# EAGLE board mBot_PCB (EAGLE 9.7.0)
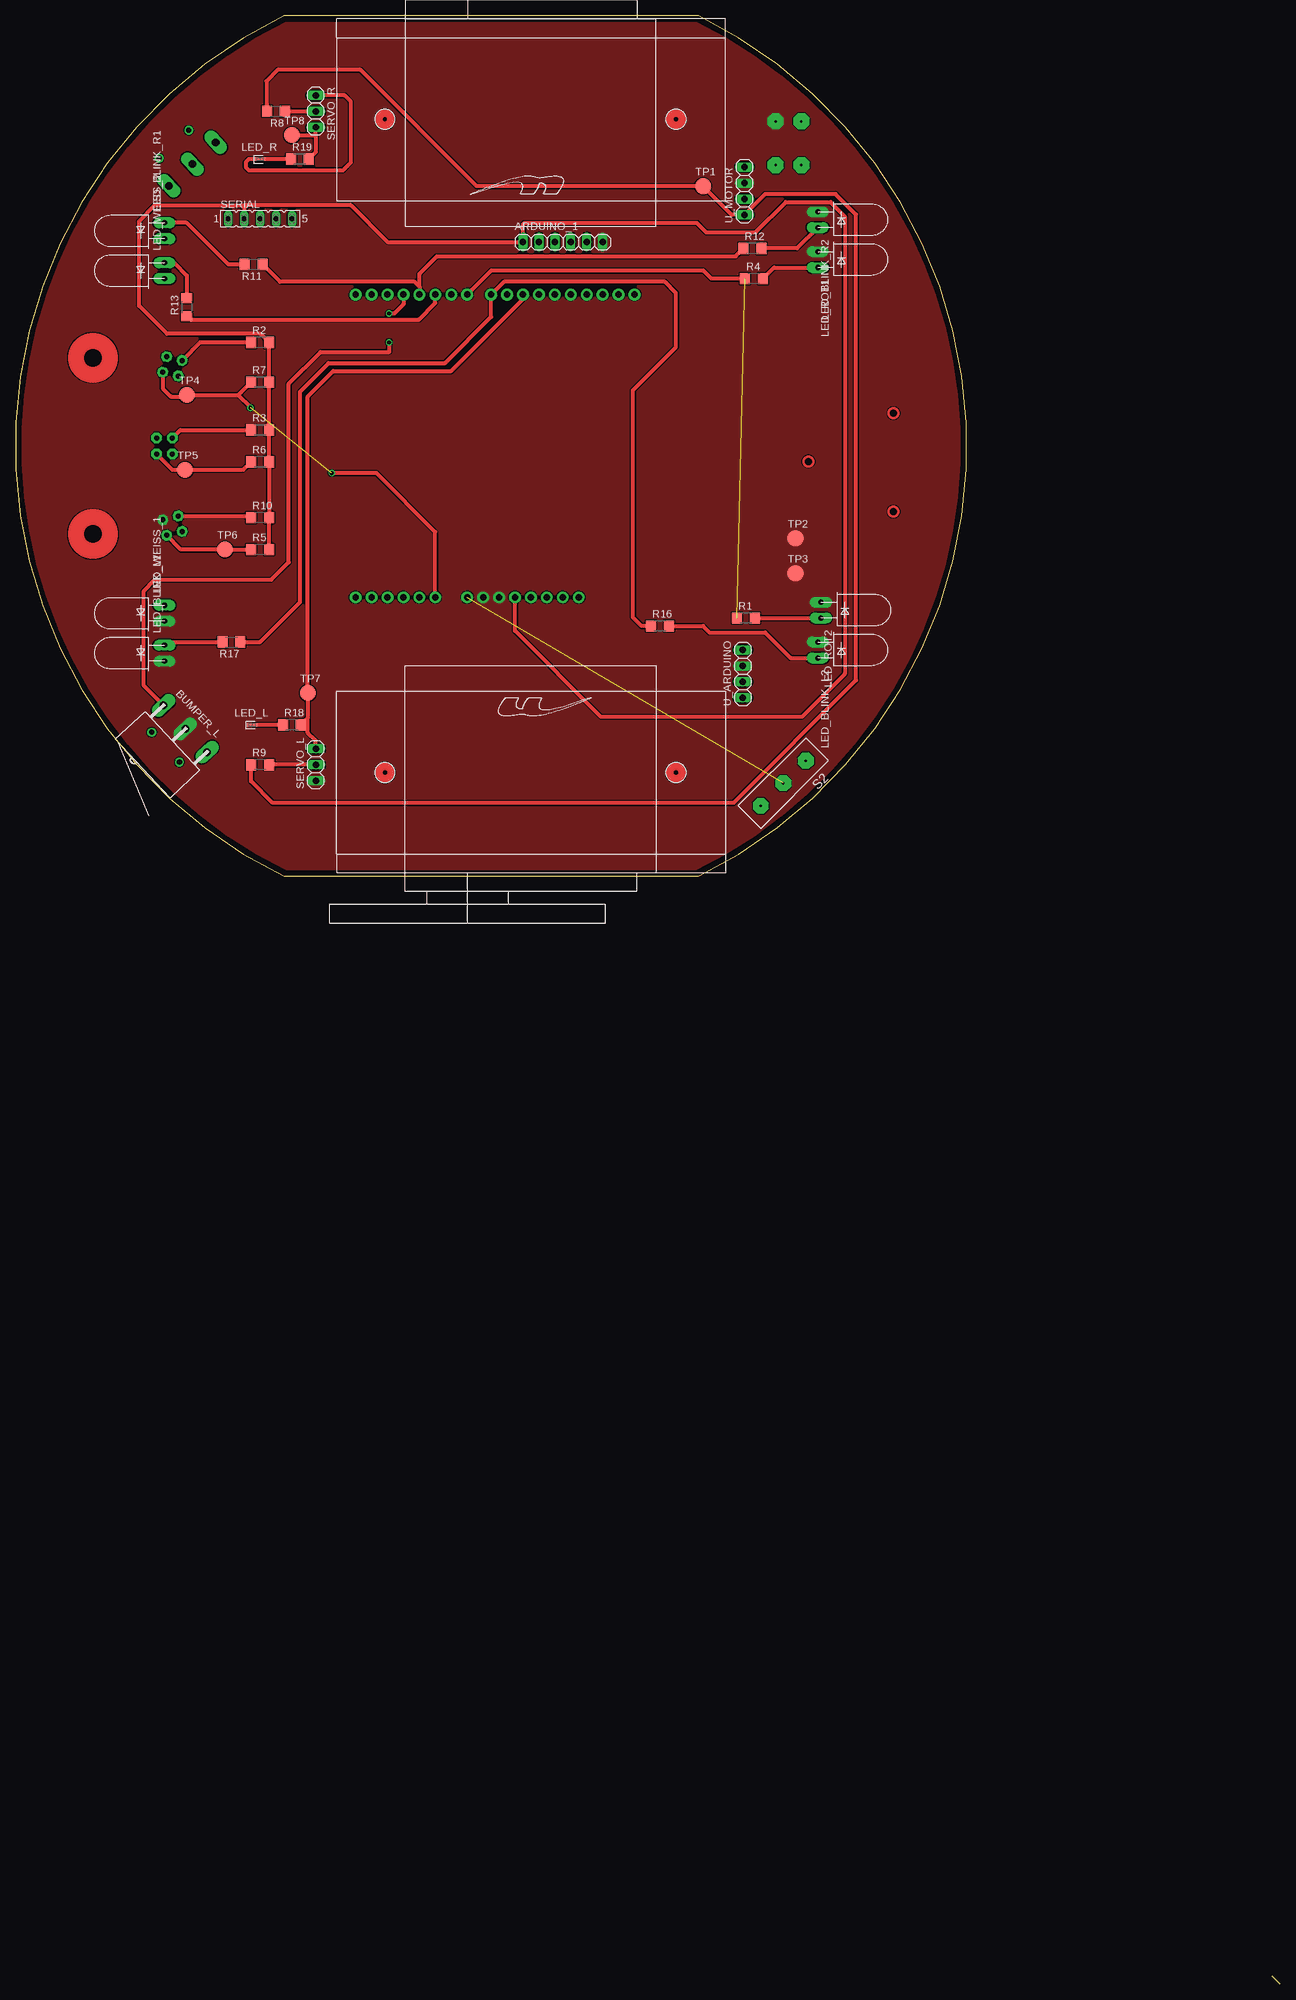
[diagram p0: board, top side]
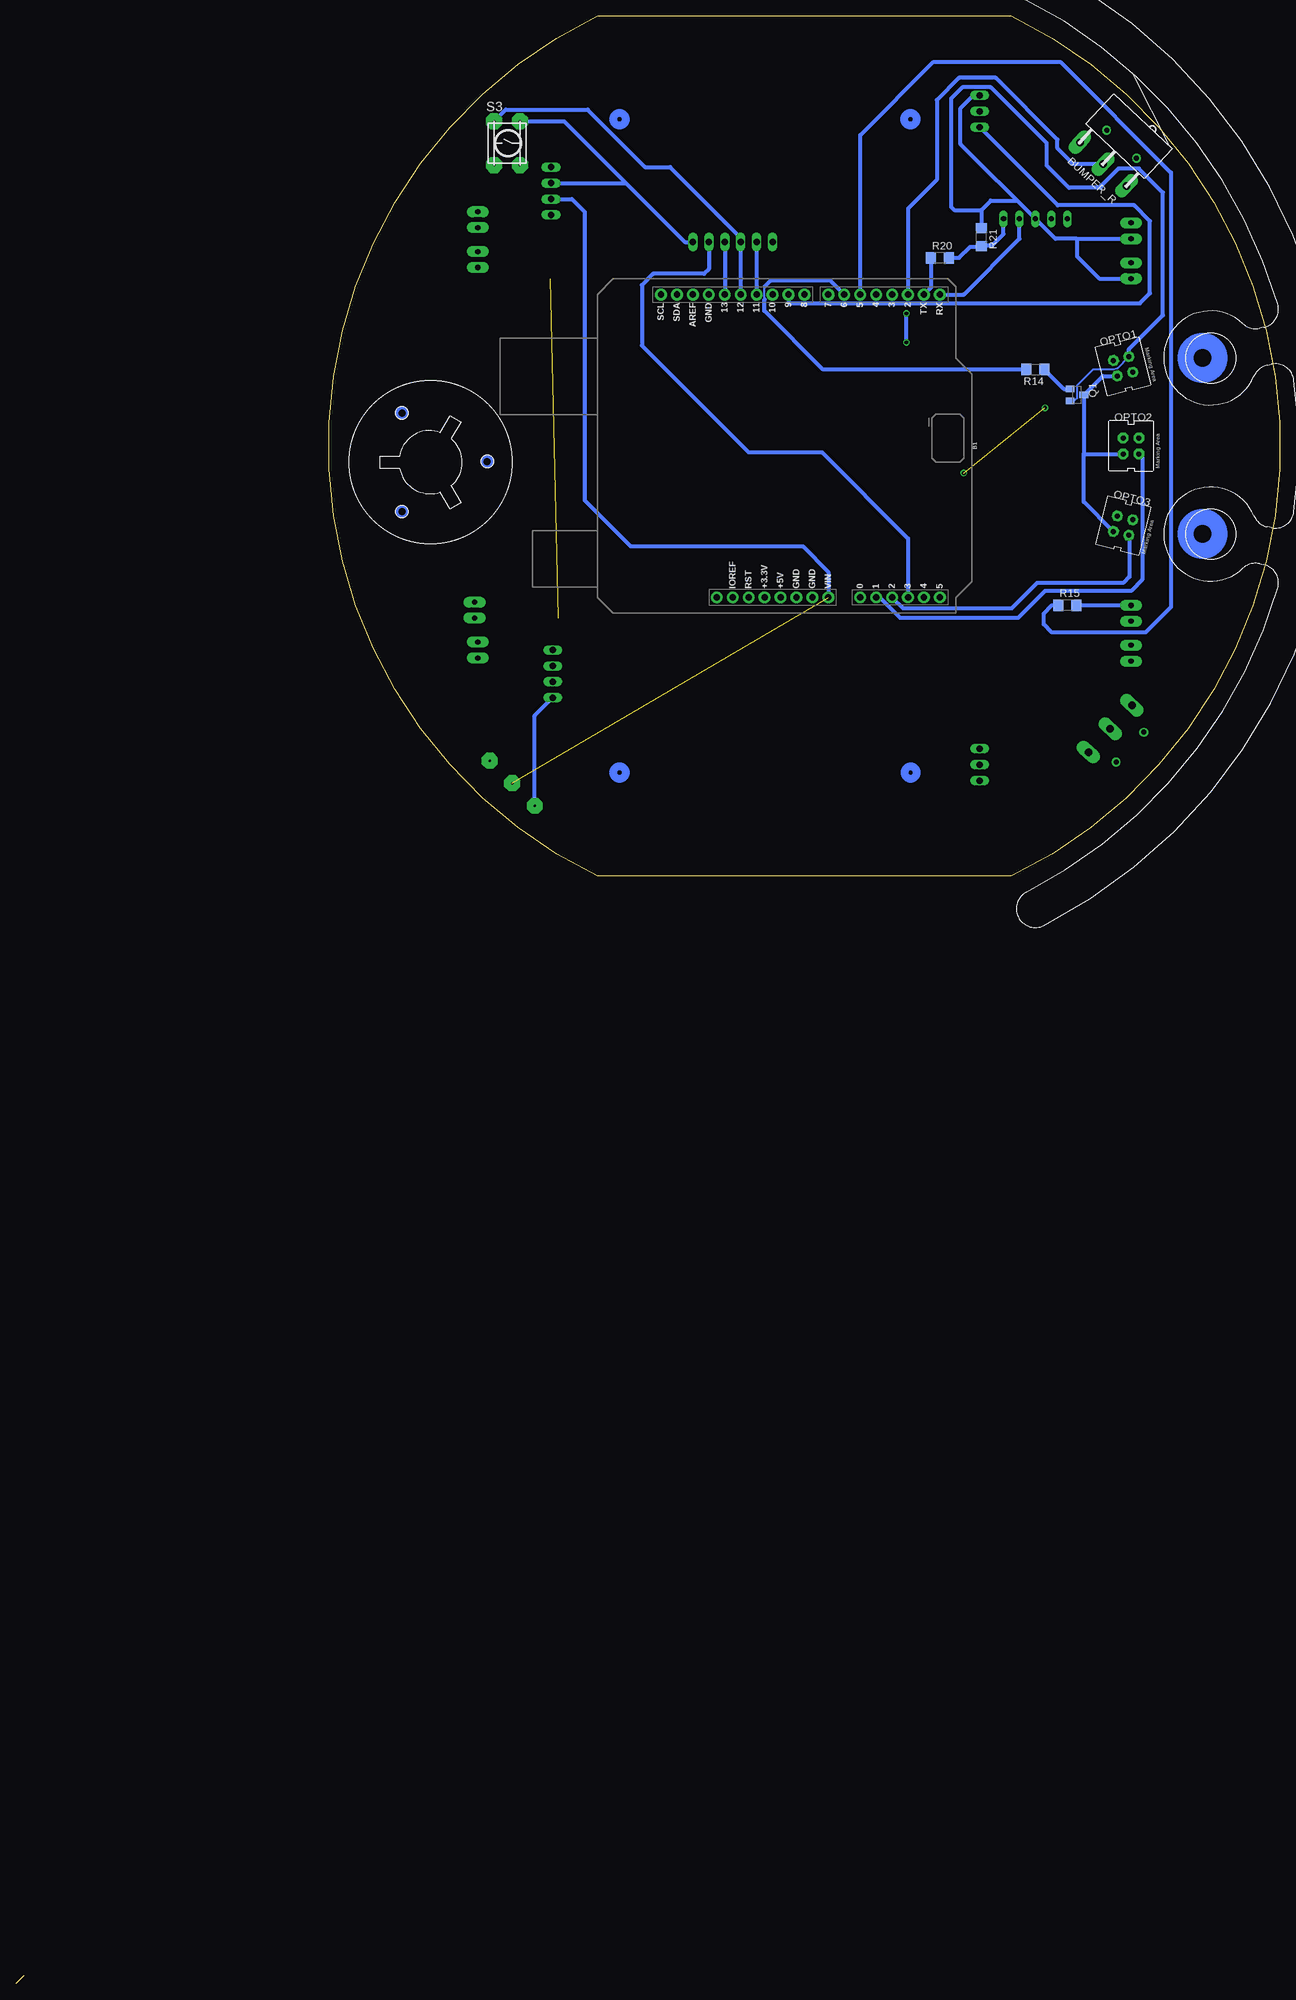
[diagram p1: board, bottom side, seen from below]

Size 201.51 x 313.69 mm. Coordinates in mm from the lower left corner, seen from the top.
Outline: 200.24,1.27 201.51,0
Outline: 42.76,176.53 108.8,176.53 arc128 108.8,313.69 42.76,313.69 arc128 42.76,176.53
Copper layers (1*16): Top 0.035mm / dielectric 1.5mm / Bottom 0.035mm
Design rules "default": minimum track width 6mil, minimum drill 0.35mm, track to track 6mil, track to pad 6mil, pad to pad 6mil, via to via 6mil, smd to smd 6mil, copper to edge 40mil, drill to drill 6mil, minimum pad ring 10mil, minimum via ring 8mil, stop-mask expansion 4mil, vias tented up to drill 0mil, thermal gap 10mil

## Footprints (pad centres in the part's own frame; a part is rotated, then mirrored left to right if it is on the bottom)
1X06 = drill 1.016 long: 1 -6.35,0; 2 -3.81,0; 3 -1.27,0; 4 1.27,0; 5 3.81,0; 6 6.35,0
UNO_R3_SHIELD = drill 1.016 pad 1.88: 3.3V 24.13,-2.54; 5V 24.13,0; A0 24.13,12.7; A1 24.13,15.24; A2 24.13,17.78; A3 24.13,20.32; A4 24.13,22.86; A5 24.13,25.4; AREF -24.13,-13.97; D2 -24.13,20.32; D3 -24.13,17.78; D4 -24.13,15.24; D5 -24.13,12.7; D6 -24.13,10.16; D7 -24.13,7.62; D8 -24.13,3.81; D9 -24.13,1.27; D10 -24.13,-1.27; D11 -24.13,-3.81; D12 -24.13,-6.35; D13 -24.13,-8.89; GND@0 24.13,2.54; GND@1 24.13,5.08; GND@2 -24.13,-11.43; IOREF 24.13,-7.62; NC 24.13,-10.16; RES 24.13,-5.08; RX -24.13,25.4; SCL -24.13,-19.05; SDA -24.13,-16.51; TX -24.13,22.86; VIN 24.13,7.62
MIKROSCHALTER_H_L = drill 1.2 pad 2.184 long: COM 5.08,-2.8; NC -5.08,-2.8; NO 0,-2.8 | drill 0.8 pad 1.4: P$1 3.25,1.5; P$2 -3.25,1.5
LED5MM-LGD = drill 0.813 pad 1.778 long: A 1.27,0; K -1.27,0
LEDC1005X25N_FLAT-B = smd 0.7 x 0.5: A 0.45,0; C -0.45,0
4 = drill 0.8 pad 1.676 octagon: A -1.27,1.27; C 1.27,-1.27; E 1.27,1.27; K -1.27,-1.27
SOT23-BEC = smd 1 x 1.4: B -0.95,-1.1; C 0,1.1; E 0.95,-1.1
R1206 = smd 1.6 x 1.803: 1 -1.422,0; 2 1.422,0
1XUM = drill 0.406 pad 2.54 octagon: 1 0,0; 2 10.16,0; W 5.08,0
MINITAST2 = drill 0.406 pad 2.54 octagon: 1 -2.223,3.493; 2 1.905,3.493; 3 -2.223,-3.493; 4 1.905,-3.493
FE05-1 = drill 0.813 long: 1 -5.08,0; 2 -2.54,0; 3 0,0; 4 2.54,0; 5 5.08,0
1X03 = drill 1.016 long: 1 -2.54,0; 2 0,0; 3 2.54,0
B2,54 = smd 2.54 x 2.54: TP 0,0
1X04 = drill 1.016 long: 1 -3.81,0; 2 -1.27,0; 3 1.27,0; 4 3.81,0

## Placement (x,y rotation side)
ARDUINO_1  [1X06]  87.21,277.62 0 top
B1  ARDUINO_UNO_R3_SHIELDBASIC  [UNO_R3_SHIELD]  79.59,245.11 270 bottom
BUMPER_L  [MIKROSCHALTER_H_L]  24.98,198.12 133 top
BUMPER_R  [MIKROSCHALTER_H_L]  26.25,292.1 317 bottom
E$1  [STANDARDSERVO01]  82.13,297.18 0 top
E$2  [STANDARDSERVO_LINKS-01]  82.13,193.04 180 top
E$3  [BALLCASTER26MM]  135.47,242.57 0 top
E$4  [BUMPER_R80]  12.28,245.11 0 bottom
LED_BLINK_L1  gelb  [LED5MM-LGD]  23.71,212.09 90 top
LED_BLINK_L2  gelb  [LED5MM-LGD]  127.85,212.6 270 top
LED_BLINK_R1  gelb  [LED5MM-LGD]  23.71,279.4 90 top
LED_BLINK_R2  gelb  [LED5MM-LGD]  127.85,281.18 270 top
LED_L  CHIP-FLAT-B_0402  [LEDC1005X25N_FLAT-B]  37.68,200.66 0 top
LED_R  CHIP-FLAT-B_0402  [LEDC1005X25N_FLAT-B]  38.95,290.83 0 top
LED_ROT1  rot  [LED5MM-LGD]  127.85,274.83 270 top
LED_ROT2  rot  [LED5MM-LGD]  128.36,218.95 270 top
LED_WEISS_1  weiss  [LED5MM-LGD]  23.71,218.44 90 top
LED_WEISS_2  weiss  [LED5MM-LGD]  23.71,273.05 90 top
OPTO1  CNY70  [4]  24.98,257.81 14 bottom
OPTO2  CNY70  [4]  23.71,245.11 0 bottom
OPTO3  CNY70  [4]  24.98,232.41 346 bottom
Q1  BC818-40SMD  [SOT23-BEC]  32.35,253.24 270 bottom
R1  220R  [R1206]  116.42,217.68 0 top
R2  150R  [R1206]  38.95,261.62 0 top
R3  150R  [R1206]  38.95,247.65 0 top
R4  220R  [R1206]  117.69,271.78 0 top
R5  10k  [R1206]  38.95,228.6 0 top
R6  10k  [R1206]  38.95,242.57 0 top
R7  10k  [R1206]  38.95,255.27 0 top
R8  1R8  [R1206]  41.49,298.45 180 top
R9  1R8  [R1206]  38.95,194.31 0 top
R10  150R  [R1206]  38.95,233.68 0 top
R11  220R  [R1206]  37.94,274.07 180 top
R12  220R  [R1206]  117.44,276.61 0 top
R13  150R  [R1206]  27.27,267.21 90 top
R14  3k3  [R1206]  38.95,257.3 180 bottom
R15  150R  [R1206]  33.87,219.71 0 bottom
R16  220R  [R1206]  102.71,216.41 0 top
R17  220R  [R1206]  34.38,213.87 180 top
R18  220R  [R1206]  44.03,200.66 0 top
R19  220R  [R1206]  45.3,290.83 0 top
R20  4k7  [R1206]  54.19,275.08 0 bottom
R21  10k  [R1206]  47.59,278.38 270 bottom
S2  [1XUM]  125.95,194.95 225 top
S3  [MINITAST2]  123.03,293.37 0 bottom
SERIAL  [FE05-1]  38.95,281.31 0 top
SERVO_L  [1X03]  47.84,194.31 90 top
SERVO_R  [1X03]  47.84,298.45 270 top
TP1  TPB2,54  [B2,54]  109.57,286.51 0 top
TP2  TPB2,54  [B2,54]  124.3,230.38 0 top
TP3  TPB2,54  [B2,54]  124.3,224.79 0 top
TP4  TPB2,54  [B2,54]  27.27,253.24 0 top
TP5  TPB2,54  [B2,54]  27.02,241.3 0 top
TP6  TPB2,54  [B2,54]  33.37,228.6 0 top
TP7  TPB2,54  [B2,54]  46.57,205.74 0 top
TP8  TPB2,54  [B2,54]  44.03,294.64 0 top
U_ARDUINO  [1X04]  115.92,208.79 90 top
U_MOTOR  [1X04]  116.17,285.75 90 top

## Library data of the parts
ARDUINO_1 SERVO_L SERVO_R U_ARDUINO U_MOTOR = pinhead
B1 = SparkFun-Boards
BUMPER_L BUMPER_R S2 S3 = Schalter_V12
E$1-E$4 = Robotparts_V12
LED_BLINK_L1 LED_BLINK_L2 LED_BLINK_R1 LED_BLINK_R2 LED_ROT1 LED_ROT2 LED_WEISS_1 LED_WEISS_2 = led-2017-03-03
LED_L LED_R = LED; CATEGORY: LED; COLOR: BLUE; DESCRIPTION: CHIP LED FLAT; SUB-CATEGORY: CHIP; TYPE: FLAT_TOP
OPTO1-OPTO3 = cny70
Q1 = transistor-npn
R1-R21 = rcl; SPICEPREFIX: R
SERIAL = con-lsta; OC_FARNELL: unknown; OC_NEWARK: unknown
TP1-TP8 = testpad

## Nets
+3V3: B1.3.3V
+5V: ARDUINO_1.1 B1.5V R2.2 R3.2 R5.2 R6.2 R7.2 R10.2 SERIAL.2
+UB: R8.2 R9.1 TP1.TP U_MOTOR.1
GND: ARDUINO_1.6 B1.GND@0 B1.GND@1 BUMPER_L.NO LED_BLINK_L1.K LED_BLINK_L2.K LED_BLINK_R2.K LED_L.C LED_ROT1.K LED_ROT2.K LED_WEISS_1.K OPTO3.E S3.2 SERVO_L.1 TP2.TP TP3.TP U_ARDUINO.3 U_MOTOR.3
N$1: B1.RX SERIAL.4
N$2: B1.TX R20.1
N$3: B1.A0 OPTO1.C R7.1 TP4.TP
N$4: OPTO1.A R2.1
N$5: B1.A1 OPTO2.C R6.1 TP5.TP
N$6: B1.A2 OPTO3.C R5.1 TP6.TP
N$7: OPTO2.A R3.1
N$8: OPTO3.A R10.1
N$9: OPTO1.K OPTO2.K OPTO3.K Q1.C
N$10: Q1.B R14.1
N$11: B1.D6 R14.2
N$12: R20.2 R21.2 SERIAL.5
N$13: ARDUINO_1.2 B1.D11
N$14: ARDUINO_1.3 B1.D12 S3.1
N$15: ARDUINO_1.4 B1.D13
N$16: ARDUINO_1.5 B1.A3
N$17: B1.D10 R18.2 SERVO_L.3 TP7.TP
N$18: LED_L.A R18.1
N$19: LED_R.A R19.1
N$20: R9.2 SERVO_L.2
N$21: B1.D9 R19.2 SERVO_R.3 TP8.TP
N$22: B1.D2 BUMPER_R.NO
N$23: B1.D3 BUMPER_L.COM
N$24: R8.1 SERVO_R.2
N$25: BUMPER_R.COM
N$26: B1.D4 R11.1 R12.1
N$27: LED_WEISS_1.A R15.2
N$28: B1.D7 R1.1 R4.1
N$29: B1.D8 R16.1 R17.1
N$30: LED_ROT1.A R4.2
N$31: LED_ROT2.A R1.2
N$32: LED_BLINK_L1.A R17.2
N$33: LED_BLINK_L2.A R16.2
N$34: LED_WEISS_2.A R13.2
N$35: B1.D5 R13.1 R15.1
N$36: LED_BLINK_R2.A R12.2
N$37: LED_BLINK_R1.A R11.2
N$38: S2.2 U_ARDUINO.1
S$1: LED_BLINK_R1.K LED_R.C LED_WEISS_2.K OPTO1.E Q1.E R21.1 SERIAL.3 SERVO_R.1
V+: B1.VIN S2.W U_MOTOR.2

## Tracks (layer width: path | path; a pad name or v marks a point on that pad's centre or on a via)
+5V
  Top 0.61: 36.41,283.46 SERIAL.2 | 36.41,283.46 53.43,283.46 59.27,277.62 ARDUINO_1.1 80.86,280.42 81.12,280.67 108.55,280.67 110.07,279.15 117.95,279.15 122.77,283.97 129.89,283.97 132.17,281.69 132.17,208.79 125.31,201.93 93.31,201.93 79.59,215.65 B1.5V | R5.2 R10.2 R6.2 R3.2 R7.2 R2.2 39.02,262.98 24.13,262.98 19.65,267.46 19.65,280.92 22.19,283.46 36.41,283.46
+UB
  Top 0.61: R8.2 39.97,298.55 39.97,303.28 41.75,305.05 54.96,305.05 73.5,286.51 TP1.TP 114.14,281.94 U_MOTOR.1 119.47,285.24 130.71,285.24 133.95,282 133.95,207.77 114.39,188.21 40.99,188.21 37.53,191.67 R9.1
GND
  Bottom 0.61: U_MOTOR.3 104.23,287.02 | 104.23,287.02 94.83,277.62 ARDUINO_1.6 | S3.2 114.07,296.86 104.23,287.02
  pour Top (no thermals): 108.8,176.28 112.87,178.56 arc124 109.3,313.69 45.35,313.69 arc35 39.72,311.91 arc-1 30.38,305.46 arc26 10.12,283.39 arc14 3.23,266.84 arc30 2.61,224.35 arc52 42.76,176.94 42.76,176.53 108.8,176.53
N$1
  Bottom 0.61: SERIAL.4 41.49,278.13 50.38,269.24 B1.RX
N$2
  Bottom 0.61: B1.TX 55.62,270.36 R20.1
N$3  (via drill 0.61, 0.61 pad 0.61)  (1 unrouted)
  Top 0.61: OPTO1.C 23.44,254.27 24.73,252.98 27.02,252.98 TP4.TP 35.5,253.24 | 35.5,253.24 R7.1 | 35.5,253.24 37.43,251.31 v37.43,251.21 | B1.A0 66.89,231.39 57.5,240.79 v50.38,240.79
N$4
  Top 0.61: OPTO1.A 29.41,261.62 R2.1
N$5
  Top 0.61: OPTO2.C 24.98,241.3 TP5.TP 36.26,241.3 R6.1
  Bottom 0.61: B1.A1 63.79,220.98 60.49,217.68 41.75,217.68 37.43,222 23.71,222 21.94,223.77 21.94,243.33 OPTO2.C
N$6
  Top 0.61: R5.1 TP6.TP 26.33,228.6 OPTO3.C
  Bottom 0.61: B1.A2 60.04,219.2 42.76,219.2 38.7,223.27 24.98,223.27 23.97,224.28 23.97,230.78 OPTO3.C
N$7
  Top 0.61: OPTO2.A 26.25,247.65 R3.1
N$8
  Top 0.61: OPTO3.A 37.26,233.95 R10.1
N$9
  Bottom 0.61: OPTO3.K 31.25,236.21 31.25,243.84 | 31.25,243.84 Q1.C 28.22,256.27 OPTO1.K | 31.25,243.84 OPTO2.K
N$10
  Bottom 0.61: R14.1 34.42,254.19 Q1.B
N$11
  Bottom 0.356: 82.13,268.48 82.13,270.51
  Bottom 0.61: 82.13,268.48 82.13,266.65 82.18,266.65 72.83,257.3 R14.2 | B1.D6 71.72,271.53 81.12,271.53 82.13,270.51
N$12
  Bottom 0.61: SERIAL.5 44.03,278.89 45.81,277.11 47.44,277.11 R21.2 47.69,276.86 49.37,276.86 51.15,275.08 R20.2
N$13
  Bottom 0.61: ARDUINO_1.2 B1.D11
N$14
  Bottom 0.61: B1.D12 ARDUINO_1.3 85.94,278.33 97.17,289.56 101.18,289.56 110.33,298.7 123.41,298.7 S3.1
N$15
  Bottom 0.61: ARDUINO_1.4 B1.D13
N$16
  Bottom 0.61: ARDUINO_1.5 91.02,273.3 91.79,272.54 99.91,272.54 101.69,270.76 101.69,261.11 84.67,244.09 72.99,244.09 59.27,230.38 B1.A3
N$17
  Top 0.61: R18.2 46.57,201.78 | 46.57,201.78 TP7.TP 46.57,252.98 50.64,257.05 69.43,257.05 80.86,268.48 B1.D10 | SERVO_L.3 47.84,198.12 46.57,199.39 46.57,201.78
N$18
  Top 0.61: R18.1 LED_L.A
N$19
  Top 0.61: R19.1 LED_R.A
N$20
  Top 0.61: R9.2 SERVO_L.2 48.1,194.31 48.35,194.06
N$21
  Top 0.61: 47.84,294.64 SERVO_R.3 | 47.84,294.64 47.84,291.95 R19.2 | TP8.TP 47.84,294.64
  Bottom 0.61: SERVO_R.3 35.4,283.46 23.21,283.46 20.72,280.97 20.72,269.44 22.32,267.84 78.2,267.84 78.32,267.97 B1.D9
N$22
  Bottom 0.61: B1.D2 59.27,282.96 54.7,287.53 54.7,300.23 51.15,303.78 45.3,303.78 35.45,293.93 35.45,292.56 32.94,290.05 BUMPER_R.NO
N$23  (via drill 0.61 pad 0.61)
  Top 0.61: BUMPER_L.COM 20.41,206.9 20.41,222 22.19,223.77 40.73,223.77 43.53,226.57 43.53,255.02 48.61,260.1 59.53,260.1 v59.53,261.62 | B1.D3 61.81,267.72 60.33,266.23 v59.53,266.23
  Bottom 0.61: v59.53,261.62 v59.53,266.23
N$24
  Top 0.61: R8.1 SERVO_R.2
N$26
  Top 0.61: R11.1 42.15,271.27 63.59,271.27 64.35,270.51 | R12.1 114.75,275.34 67.15,275.34 64.35,272.54 64.35,270.51 | 64.35,270.51 B1.D4
N$27
  Bottom 0.61: R15.2 LED_WEISS_1.A
N$28  (1 unrouted)
  Top 0.61: R4.1 110.9,271.78 109.63,273.05 75.78,273.05 B1.D7
N$29
  Top 0.61: R17.1 38.95,213.87 45.3,220.22 45.3,253.75 49.88,258.32 68.42,258.32 75.78,265.68 B1.D8 77.82,271.27 103.47,271.27 105.25,269.49 105.25,260.86 98.39,254 98.39,217.78 99.76,216.41 R16.1
N$30
  Top 0.61: LED_ROT1.A 120.89,273.56 R4.2
N$31
  Top 0.61: R1.2 LED_ROT2.A
N$32
  Top 0.61: LED_BLINK_L1.A 24.22,213.87 R17.2
N$33
  Top 0.61: R16.2 109.57,216.41 110.58,215.39 119.47,215.39 123.54,211.33 LED_BLINK_L2.A
N$34
  Top 0.61: R13.2 27.27,272.29 25.24,274.32 LED_WEISS_2.A
N$35
  Top 0.61: B1.D5 66.89,267.88 64.28,265.26 27.79,265.26 R13.1
  Bottom 0.61: R15.1 36.31,219.71 37.63,218.39 37.63,216.71 36.31,215.39 21.43,215.39 17.36,219.46 17.36,288.67 35.01,306.32 55.21,306.32 66.89,294.64 B1.D5
N$36
  Top 0.61: LED_BLINK_R2.A 124.55,276.61 R12.2
N$37
  Top 0.61: LED_BLINK_R1.A 27.27,280.67 33.87,274.07 R11.2
N$38
  Bottom 0.61: S2.2 118.76,202.13 U_ARDUINO.1
S$1
  Top 0.61: SERVO_R.1 52.42,300.99 53.43,299.97 53.43,290.32 52.16,289.05 37.18,289.05 36.67,289.56 36.67,290.32 37.18,290.83 LED_R.C
  Bottom 0.356: OPTO1.E 25.94,257.47 26.6,257.3 29.81,257.3 32.35,254.76 32.35,252.73 32.86,252.22 33.38,252.22 Q1.E
  Bottom 0.61: SERIAL.3 35.78,278.13 32.35,278.13 | 32.35,278.13 LED_BLINK_R1.K | LED_WEISS_2.K 28.79,271.78 32.35,275.34 32.35,278.13 | SERIAL.3 41.87,284.23 46.07,284.23 47.59,282.7 | 47.59,282.7 R21.1 | OPTO1.E 24.06,260.51 18.63,265.94 18.63,285.5 22.44,289.31 25.75,289.31 28.54,286.51 28.54,286.26 33.62,286.26 37.18,289.81 37.18,293.37 46.07,302.26 50.64,302.26 52.42,300.48 52.42,283.21 51.91,282.7 47.59,282.7 | SERIAL.3 50.89,293.24 50.89,298.96 48.86,300.99 SERVO_R.1
V+  (1 unrouted)
  Bottom 0.61: U_MOTOR.2 112.87,284.48 110.84,282.45 110.84,236.47 103.47,229.11 76.04,229.11 71.97,225.04 B1.VIN